# EAGLE board NS_ARM_Control_07_15_2017 (EAGLE 6.6.0)
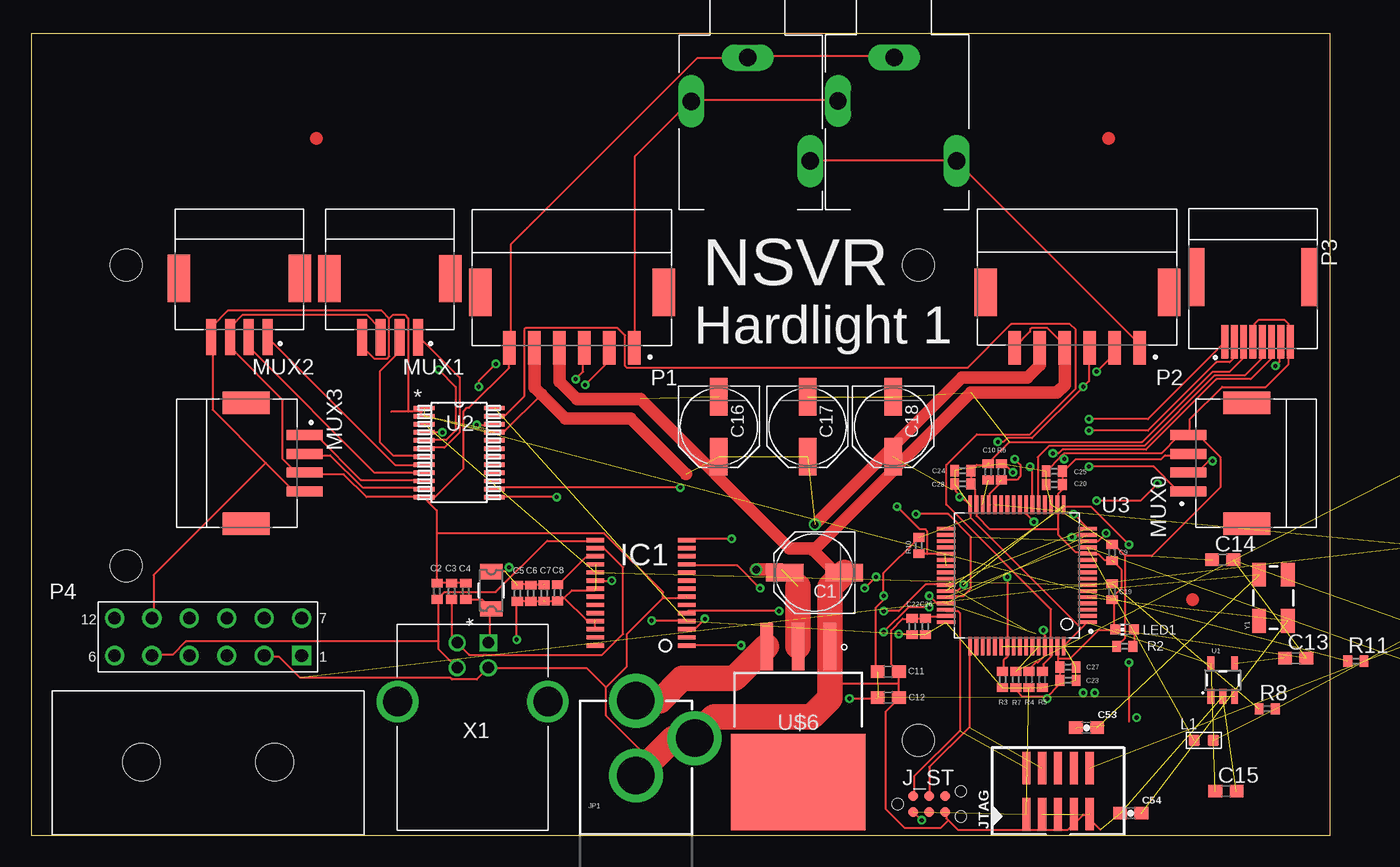
[diagram p0: board, top side]
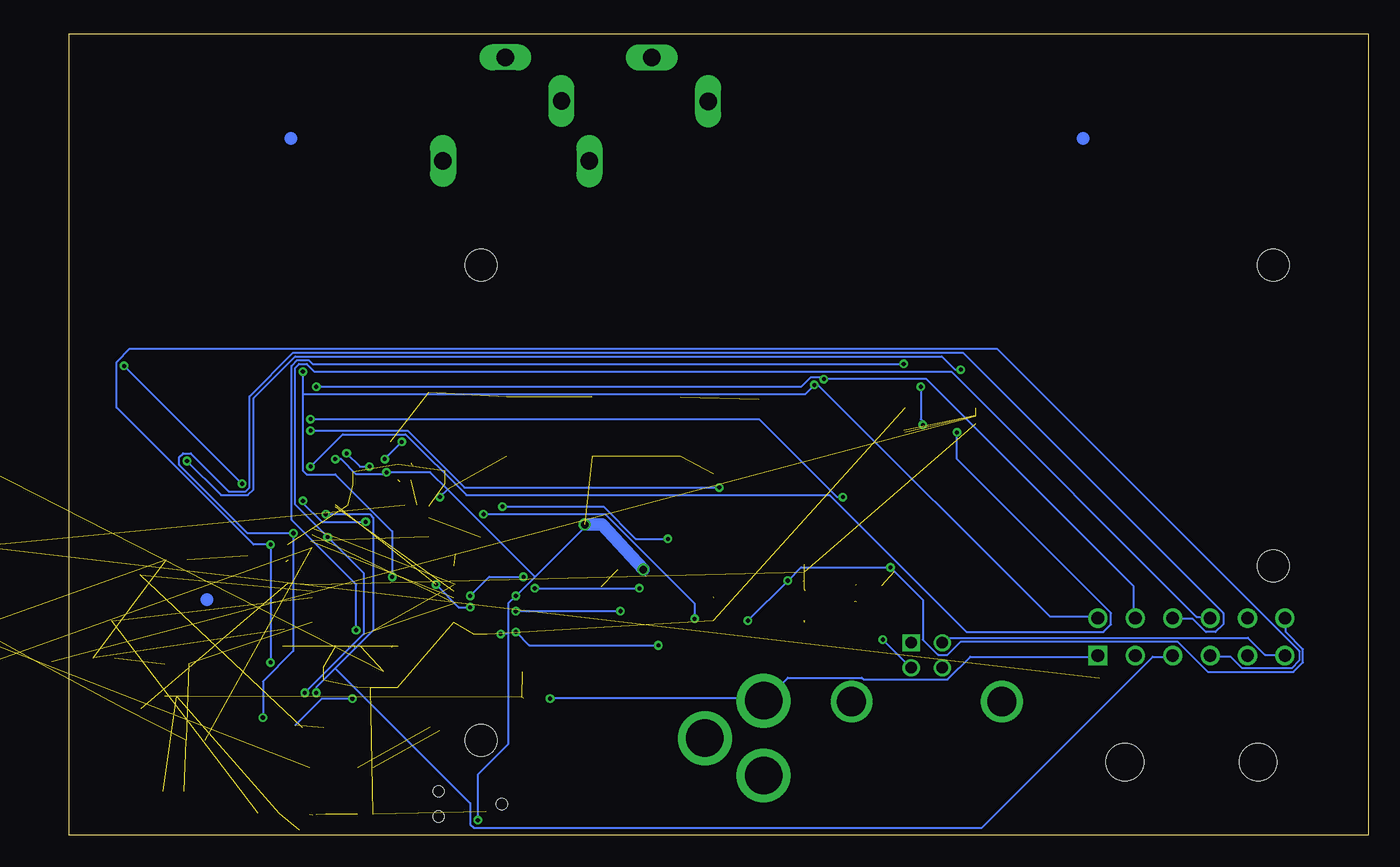
[diagram p1: board, bottom side, seen from below]

Size 104.14 x 64.26 mm. Coordinates in mm from the lower left corner, seen from the top.
Outline: 104.14,0 104.14,64.26 0,64.26 0,0 104.14,0
Copper layers (1*16): Top 0.0356mm / dielectric 1.5011mm / Bottom 0.0356mm
Design rules "LaenPCBOrder (OSH Park)": minimum track width 6mil, minimum drill 13mil, track to track 6mil, track to pad 6mil, pad to pad 6mil, via to via 6mil, smd to smd 6mil, copper to edge 15mil, drill to drill 6mil, minimum pad ring 7mil, minimum via ring 7mil, stop-mask expansion 3mil, vias tented up to drill 0mil, thermal gap 10mil
Net classes: 1 vcc: width 0.254 mm
Holes 2.54 mm at 71.12,45.72 7.62,45.72 71.12,7.62 7.62,21.59

## Footprints (pad centres in the part's own frame; a part is rotated, then mirrored left to right if it is on the bottom)
PANASONIC_D = smd 3 x 1.4: + 2.4,0; - -2.4,0
C0402 = smd 0.7 x 0.9: 1 -0.65,0; 2 0.65,0
C0603 = smd 1.1 x 1: 1 -0.85,0; 2 0.85,0
0603-CAP = smd 1.1 x 1: 1 -0.85,0; 2 0.85,0
1206LSERIES = smd 1.219 x 1.778: 1 -1.499,0; 2 1.499,0
SSOP28DB = smd 0.348 x 1.397: 1 -4.225,-3.656; 2 -3.575,-3.656; 3 -2.925,-3.656; 4 -2.275,-3.656; 5 -1.625,-3.656; 6 -0.975,-3.656; 7 -0.325,-3.656; 8 0.325,-3.656; 9 0.975,-3.656; 10 1.625,-3.656; 11 2.275,-3.656; 12 2.925,-3.656; 13 3.575,-3.656; 14 4.225,-3.656; 15 4.225,3.656; 16 3.575,3.656; 17 2.925,3.656; 18 2.275,3.656; 19 1.625,3.656; 20 0.975,3.656; 21 0.325,3.656; 22 -0.325,3.656; 23 -0.975,3.656; 24 -1.625,3.656; 25 -2.275,3.656; 26 -2.925,3.656; 27 -3.575,3.656; 28 -4.225,3.656
TC2030-MCP-NL = smd 0.787 x 0.787: 1 1.27,-0.635; 2 1.27,0.635; 3 2.54,-0.635; 4 2.54,0.635; 5 3.81,-0.635; 6 3.81,0.635 | hole 0.889: 0,0; 5.08,-1.016; 5.08,1.016
POWER_JACK_PTH = drill 2.997 pad 4.318: GND 0,7.7; GNDBREAK 4.7,10.7; PWR 0,13.7
2X05_1.27MM_SMT = smd 0.65 x 2.6: 1 -2.54,-1.85; 2 -2.54,1.85; 3 -1.27,-1.85; 4 -1.27,1.85; 5 0,-1.85; 6 0,1.85; 7 1.27,-1.85; 8 1.27,1.85; 9 2.54,-1.85; 10 2.54,1.85
L0603 = smd 0.889 x 0.889: 1 -0.762,0; 2 0.762,0
CHIP-LED0603 = smd 0.8 x 0.8: A 0,-0.75; C 0,0.75
MOLEX_502585-0470 = smd 0.8 x 2.9: 1 -2.25,0; 2 -0.75,0; 3 0.75,0; 4 2.25,0 | smd 1.8 x 3.8: P1 -4.85,-4.7; P2 4.85,-4.7
MOLEX_502494-0670 = smd 1 x 2.7: 1 -5,0; 2 -3,0; 3 -1,0; 4 1,0; 5 3,0; 6 5,0 | smd 1.8 x 3.8: P1 -7.35,-4.45; P2 7.35,-4.45
MOLEX_503148-0890 = smd 0.55 x 2.7: 1 2.25,0; 2 1.5,0; 3 0.75,0; 4 0,0; 5 -0.75,0; 6 -1.5,0; 7 -2.25,0; 8 -3,0 | smd 1.2 x 4.65: P1 -4.48,-5.175; P2 4.48,-5.175
MOLEX_44428-1201 = drill 1.02 square: 1 7.5,5.065 | drill 1.02: 2 4.5,5.065; 3 1.5,5.065; 4 -1.5,5.065; 5 -4.5,5.065; 6 -7.5,5.065; 7 7.5,8.065; 8 4.5,8.065; 9 1.5,8.065; 10 -1.5,8.065; 11 -4.5,8.065; 12 -7.5,8.065 | hole 3: -5.34,-3.465; 5.34,-3.465
R0402 = smd 0.7 x 0.9: 1 -0.65,0; 2 0.65,0
0603-RES = smd 1.1 x 1: 1 -0.85,0; 2 0.85,0
SOT23-5 = smd 0.55 x 1.2: 1 -0.95,-1.3; 2 0,-1.3; 3 0.95,-1.3; 4 0.95,1.3; 5 -0.95,1.3
PW24 = smd 1.676 x 0.356: 1 -2.819,3.575; 2 -2.819,2.925; 3 -2.819,2.275; 4 -2.819,1.625; 5 -2.819,0.975; 6 -2.819,0.325; 7 -2.819,-0.325; 8 -2.819,-0.975; 9 -2.819,-1.625; 10 -2.819,-2.275; 11 -2.819,-2.925; 12 -2.819,-3.575; 13 2.819,-3.575; 14 2.819,-2.925; 15 2.819,-2.275; 16 2.819,-1.625; 17 2.819,-0.975; 18 2.819,-0.325; 19 2.819,0.325; 20 2.819,0.975; 21 2.819,1.625; 22 2.819,2.275; 23 2.819,2.925; 24 2.819,3.575
QFP50P1200X1200X160-64N = smd 1.5 x 0.3: 1 -5.67,3.75; 2 -5.67,3.25; 3 -5.67,2.75; 4 -5.67,2.25; 5 -5.67,1.75; 6 -5.67,1.25; 7 -5.67,0.75; 8 -5.67,0.25; 9 -5.67,-0.25; 10 -5.67,-0.75; 11 -5.67,-1.25; 12 -5.67,-1.75; 13 -5.67,-2.25; 14 -5.67,-2.75; 15 -5.67,-3.25; 16 -5.67,-3.75; 33 5.67,-3.75; 34 5.67,-3.25; 35 5.67,-2.75; 36 5.67,-2.25; 37 5.67,-1.75; 38 5.67,-1.25; 39 5.67,-0.75; 40 5.67,-0.25; 41 5.67,0.25; 42 5.67,0.75; 43 5.67,1.25; 44 5.67,1.75; 45 5.67,2.25; 46 5.67,2.75; 47 5.67,3.25; 48 5.67,3.75 | smd 0.3 x 1.5: 17 -3.75,-5.67; 18 -3.25,-5.67; 19 -2.75,-5.67; 20 -2.25,-5.67; 21 -1.75,-5.67; 22 -1.25,-5.67; 23 -0.75,-5.67; 24 -0.25,-5.67; 25 0.25,-5.67; 26 0.75,-5.67; 27 1.25,-5.67; 28 1.75,-5.67; 29 2.25,-5.67; 30 2.75,-5.67; 31 3.25,-5.67; 32 3.75,-5.67; 49 3.75,5.67; 50 3.25,5.67; 51 2.75,5.67; 52 2.25,5.67; 53 1.75,5.67; 54 1.25,5.67; 55 0.75,5.67; 56 0.25,5.67; 57 -0.25,5.67; 58 -0.75,5.67; 59 -1.25,5.67; 60 -1.75,5.67; 61 -2.25,5.67; 62 -2.75,5.67; 63 -3.25,5.67; 64 -3.75,5.67
SJ1-351XN = drill 1.4 long: 1 0.8,0; 2 4.3,-4.5; 3 9.1,5
TO254P1524X483-4N = smd 3.8 x 1: 1 -6.4,2.54; 2 -6.4,0; 3 -6.4,-2.54 | smd 7.75 x 10.75: TAB 4.45,0
OST_USB-B1HSB6 = drill 0.92 square: 1 1.25,4.71 | drill 0.92: 2 -1.25,4.71; 3 -1.25,2.71; 4 1.25,2.71 | drill 2.33: P1 -6.02,0; P2 6.02,0
CRYSTAL-SMD-5X3 = smd 1.9 x 1.1: 1 -1.85,-1.15; 2 1.85,-1.15; 3 1.85,1.15; 4 -1.85,1.15

## Placement (x,y rotation side)
C1  47u  [PANASONIC_D]  62.78,21.07 180 top
C2  47pF  [C0402]  32.53,19.58 90 top
C3  47pF  [C0402]  33.7,19.58 90 top
C4  100nF  [C0402]  34.84,19.57 90 top
C5  100nF  [C0402]  38.97,19.41 270 top
C6  4.7uF  [C0402]  40.04,19.42 270 top
C7  100nF  [C0402]  41.12,19.44 270 top
C8  0.1uF  [C0402]  42.19,19.45 270 top
C9  10nF  [C0402]  86.63,22.68 270 top
C10  2.2uF  [C0402]  76.71,29.14 90 top
C11  10uF  [C0603]  68.69,13.13 0 top
C12  10uF  [C0603]  68.7,11.06 0 top
C13  470pF  [C0603]  101.35,14.22 0 top
C14  10uF  [C0603]  95.5,22.1 0 top
C15  10uF  [C0603]  95.76,3.56 0 top
C16  47u  [PANASONIC_D]  55.12,32.77 270 top
C17  47u  [PANASONIC_D]  62.23,32.77 270 top
C18  47u  [PANASONIC_D]  69.09,32.77 270 top
C19  100nF  [C0402]  86.63,19.54 270 top
C20  100nF  [C0402]  82,28.14 0 top
C22  100nF  [C0402]  70.61,16.76 90 top
C23  100nF  [C0402]  83.1,12.44 180 top
C24  100nF  [C0402]  74.67,29.24 0 top
C25  4.7uF  [C0402]  82,29.19 0 top
C26  4.7uF  [C0402]  71.67,16.76 90 top
C27  4.7uF  [C0402]  83.1,13.5 180 top
C28  4.7uF  [C0402]  74.67,28.18 0 top
C29  1uF  [C0402]  112.27,13.46 0 top  (outside the outline)
C53  33pF  [0603-CAP]  84.58,8.64 0 top
C54  33pF  [0603-CAP]  88.14,1.78 0 top
C60  0.1uF  [0603-CAP]  111.51,17.02 0 top  (outside the outline)
F1  1206L050YR  [1206LSERIES]  36.88,19.65 90 top
IC1  FT232RL  [SSOP28DB]  48.87,19.46 90 top
J_ST  [TC2030-MCP-NL]  69.44,2.52 0 top
JP1  POWER_JACKPTH  [POWER_JACK_PTH]  48.47,-2.9 0 top
JTAG  [2X05_1.27MM_SMT]  82.3,3.56 0 top
L1  120OHM-500MA  [L0603]  93.98,7.62 0 top
LED1  [CHIP-LED0603]  87.64,16.5 90 top
MUX0  502585-0470  [MOLEX_502585-0470]  92.73,29.84 90 top
MUX1  502585-0470  [MOLEX_502585-0470]  28.76,39.94 180 top
MUX2  502585-0470  [MOLEX_502585-0470]  16.7,39.95 180 top
MUX3  502585-0470  [MOLEX_502585-0470]  21.93,29.84 270 top
P1  502494-0670  [MOLEX_502494-0670]  43.34,39.09 180 top
P2  502494-0670  [MOLEX_502494-0670]  83.84,39.1 180 top
P3  503148-0890  [MOLEX_503148-0890]  97.92,39.58 180 top
P4  44428-1201  [MOLEX_44428-1201]  14.18,9.35 0 top
R1  DNP  [R0402]  111.51,23.11 0 top  (outside the outline)
R2  470  [R0402]  87.65,15.17 0 top
R3  4.7k  [R0402]  77.85,12.5 90 top
R4  4.7k  [R0402]  79.98,12.5 90 top
R5  4.7k  [R0402]  81.04,12.51 90 top
R6  4.7k  [R0402]  77.76,29.15 270 top
R7  10k  [R0402]  78.92,12.5 90 top
R8  10k  [R0402]  99.06,10.16 0 top
R10  10k  [R0402]  71.14,23.23 90 top
R11  10k  [R0402]  106.17,13.97 0 top
R12  DNP  [R0402]  113.54,30.48 0 top  (outside the outline)
R14  10k  [0603-RES]  118.11,18.03 0 top  (outside the outline)
U1  3.3V/150mA  [SOT23-5]  95.5,12.45 0 top
U2  PCA9548A_PW_24  [PW24]  34.3,30.69 0 top
U3  STM32F401RET6  [QFP50P1200X1200X160-64N]  79,20.84 180 top
U$1  [CIRCLE-1MM-3R]  22.86,55.88 0 top
U$2  [CIRCLE-1MM-3R]  86.36,55.88 0 top
U$3  SJ1-3513N  [SJ1-351XN]  69.16,63.18 270 top
U$4  SJ1-3513N  [SJ1-351XN]  57.42,63.16 270 top
U$5  [CIRCLE-1MM-3R]  93.09,18.89 0 top
U$6  LMS1585AIS-3.3/NOPB-ND  [TO254P1524X483-4N]  61.48,8.74 270 top
X1  USB-B1HSB6  [OST_USB-B1HSB6]  35.39,10.73 0 top
Y1  8MHz  [CRYSTAL-SMD-5X3]  99.57,19.05 90 top

## Library data of the parts
C1 C16-C18 = SparkFun-Capacitors
C2-C15 C19 C20 C22-C29 R1-R8 R10-R12 = rcl
C53 C54 C60 = BeeSafe
F1 = 1206L050; COPYRIGHT: Copyright C 2015 Accelerated Designs. All rights reserved; MANUFACTURER_PART_NUMBER: 1206L050YR; VENDOR: Littelfuse Inc
IC1 = ftdichip-3
J_ST = tag-connect
JP1 = SparkFun-Connectors; PROD_ID: CONN-08197
JTAG = PatternAgents-Cypress
L1 = Seeed-Inductor-2016; MPN: BLM18AG121SN1D
LED1 = led
MUX0 MUX1-MUX3 = 502585-0470; AVAILABILITY: Good; DESCRIPTION: 1.50mm Pitch CLIK-Mate™ Wire-to-Board PCB Receptacle, Single Row, Right Angle, 4 Circuits; MF: Molex; MP: 502585-0470; PACKAGE: None; PRICE: 0.44 USD
P1 P2 = 502494-0670; AVAILABILITY: Good; DESCRIPTION: 2.00mm Pitch CLIK-Mate™ Wire-to-Board PCB Receptacle, Single Row, Right Angle, 6 Circuits; MF: Molex; MP: 502494-0670; PACKAGE: None; PRICE: 0.53 USD
P3 = 503148-0890; AVAILABILITY: Good; DESCRIPTION: 1.5wb Dual r/a Embs Tape Pkg 8p; MF: Molex; MP: 503148-0890; PACKAGE: None; PRICE: 1.11 USD
P4 = 44428-1201; AVAILABILITY: Good; DESCRIPTION: Conn Wire to Board HDR 12 POS 3mm Solder RA Thru-Hole Micro-Fit 3.0 BMI? Tray; MF: Molex; MP: 44428-1201; PACKAGE: None; PRICE: 2.39 USD
R14 = PatternAgents-Misc
U1 = SparkFun-PowerIC; PROD_ID: VREG-00822
U2 = PCA9548A_PW_124; DATASHEETURL: http://www.ti.com/lit/gpn/PCA9548A; DESCRIPTION: 8-Channel I2C Switch With Reset; FAMILY_NAME: I2C MULTIPLEXER, SWITCH; GENERIC_PART_NUMBER: PCA9548A; INDUSTRY_STD_PKG_TYPE: TSSOP; MANUFACTURER: Texas Instruments; MANUFACTURER_PART_NUMBER: pca9548a_pw_24; PACKAGE_DESIGNATOR: PW; PIN_COUNT: 24; VENDOR: Texas Instruments
U3 = STM32F401RET6; AVAILABILITY: Good; DESCRIPTION: MCU 32-Bit STM32 ARM Cortex M4 RISC 512KB Flash 1.8V/2.5V/3.3V 64-Pin LQFP Tray; MF: STMicroelectronics; MP: STM32F401RET6; PACKAGE: LQFP-64 STMicroelectronics; PRICE: 4.74 USD
U$1 U$2 U$5 = fiducial
U$3 U$4 = audio_mux
U$6 = TO254P1524X483-4N
X1 = USB-B1HSB6; AVAILABILITY: Warning; DESCRIPTION: Conn Usb Type b r/a Black; MF: On Shore Technology; MP: USB-B1HSB6; PACKAGE: None; PRICE: 0.42 USD
Y1 = SparkFun2

## Nets
3.3FV: C8.1 IC1.17
3V3_EXT: C1.+ C14.1 C16.+ C17.+ C18.+ MUX0.4 MUX1.4 MUX2.4 MUX3.4 P1.5 P2.5 P3.4 P3.8 P4.11 U$6.2
5V0: C5.1 C6.1 C7.1 F1.2 IC1.20 P4.12
!PWREN_FTDI: IC1.14 R10.1 U3.39
!RST: C19.1 IC1.19 R8.1 U2.3 U3.7
!RXLED_FTDI: IC1.22
!SLEEP_FTDI: IC1.12
!SWRST_ST: JTAG.10 R14.1
!TXDEN_FTDI: IC1.13
!TXLED_FTDI: IC1.23
AUD_L: P1.1 U$3.2 U$4.2
AUD_R: P2.1 U$3.3 U$4.3
BOOT0: R7.2 R12.1 U3.60
BOOT1: R1.2 U3.28
CTS_BMD: P4.10 U3.45
CTS_FTDI: IC1.11 U3.15
DCD_FTDI: IC1.10
DSR_FTDI: IC1.9
DTR_FTDI: IC1.2
GND: C1.- C2.2 C3.2 C4.2 C5.2 C6.2 C7.2 C8.2 C9.2 C10.2 C11.2 C12.2 C13.2 C14.2 C15.2 C16.- C17.- C18.- C19.2 C20.2 C22.2 C23.2 C24.2 C25.2 C26.2 C27.2 C28.2 C29.2 C53.1 C54.1 C60.1 IC1.7 IC1.18 IC1.21 IC1.25 IC1.26 J_ST.5 JP1.GND JP1.GNDBREAK JTAG.3 JTAG.5 JTAG.7 JTAG.9 LED1.C MUX0.3 MUX1.3 MUX2.3 MUX3.3 P1.4 P1.6 P2.4 P2.6 P3.3 P4.2 R1.1 R7.1 U1.2 U2.12 U3.12 U3.18 U3.31 U3.47 U3.63 U$3.1 U$4.1 U$6.1 X1.4
I2C0_SDA: U2.23
I2C1_SCL: R4.2 U2.22 U3.61
I2C1_SDA: R5.2 U3.62
I2C2_SCL: P1.3 P2.3 P4.8 R6.2 U3.29
I2C2_SDA: P1.2 P2.2 P4.7 R3.2 U3.55
LED1: LED1.A R2.2
N$2: C4.1 F1.1 X1.1
N$7: C13.1 U1.4
N$9: U3.41
N$10: U3.50
OSC_IN: C54.2 U3.5 Y1.1
OSC_OUT: C53.2 U3.6 Y1.3
OSCI_FTDI: IC1.27
OSCO_FTDI: IC1.28
PA4: U3.20
PB0: U3.26
PB1: U3.27
PB4: U3.56
PB5: U3.57
PB6: U3.58
PB7: U3.59
PB12: U3.33
PB13: U3.34
PB14: U3.35
PB15: U3.36
PC0: U3.8
PC1: U3.9
PC2: U3.10
PC3: U3.11
PC4: U3.24
PC5: U3.25
PC9: U3.40
PC10: U3.51
PC11: U3.52
PC12: U3.53
PC13: U3.2
PC14: U3.3
PC15: U3.4
PUP: R11.1 U2.1 U2.2 U2.21
PWM_B: P3.7 U3.23
PWM_G: P3.6 U3.22
PWM_R: P3.5 U3.21
RI_FTDI: IC1.6
RTS_BMD: P4.9 U3.44
RTS_FTDI: IC1.3 U3.14
RXD_BMD: P4.3 U3.42
RXD_FTDI: IC1.5 U3.16
SC0: MUX0.2 U2.5
SC1: MUX1.2 U2.7
SC2: MUX2.2 U2.9
SC3: MUX3.2 U2.11
SC4: P3.2 U2.14
SC5: U2.16
SC6: U2.18
SC7: U2.20
SD0: MUX0.1 U2.4
SD1: MUX1.1 U2.6
SD2: MUX2.1 U2.8
SD3: MUX3.1 U2.10
SD4: P3.1 U2.13
SD5: U2.15
SD6: U2.17
SD7: U2.19
STATUS_LED: R2.1 U3.54
SWCLK_ST: J_ST.4 JTAG.4 U3.49
SWDIO_ST: J_ST.2 JTAG.2 U3.46
SWO_ST: JTAG.6
SWV_ST: JTAG.8
TXD_BMD: P4.4 U3.43
TXD_FTDI: IC1.1 U3.17
UART6_RX: U3.38
UART6_TX: U3.37
USB_D+: C2.1 IC1.15 P4.5 X1.3
USB_D-: C3.1 IC1.16 P4.6 X1.2
VCAP: C10.1 U3.30
VDD: C9.1 C15.1 C20.1 C22.1 C23.1 C24.1 C25.1 C26.1 C27.1 C28.1 C60.2 IC1.4 J_ST.1 JTAG.1 L1.2 R3.1 R4.1 R5.1 R6.1 R8.2 R10.2 R11.2 R12.2 R14.2 U1.5 U2.24 U3.1 U3.19 U3.32 U3.48 U3.64
VDDA: C29.1 L1.1 U3.13
VIN_DC: C11.1 C12.1 JP1.PWR P4.1 U1.1 U1.3 U$6.3
VSS(GND): J_ST.3

## Tracks (layer width: path | path; a pad name or v marks a point on that pad's centre or on a via)
3.3FV
  Top 0.152: C8.1 42.27,20.12 44.4,22.25 45.16,22.25 IC1.17
3V3_EXT  (via drill 0.33, 0.6)  (8 unrouted)
  Top 0.152: 52.17,28.65 52.49,28.97 | 87.68,22.4 86.77,23.32 | 87.68,22.4 87.68,15.85 87.07,15.24 | P3.4 98.04,39.62 98.04,41 98.35,41.3 100.48,41.3 100.79,41 100.79,39.62 P3.8 100.79,39.47 100.79,37.8 98.96,35.97 95.45,35.97 92.86,33.38 92.86,32.16 MUX0.4 | 82.5,30.33 82.8,30.63 90.58,30.63 91.95,32 92.71,32 MUX0.4 | 82.5,30.33 81.43,29.26 | 87.68,22.4 89.81,22.4 95.3,27.89 95.3,30.33 93.62,32 92.86,32 MUX0.4 | 31.14,33.98 31.29,33.98 31.45,34.14 | 31.14,33.98 30.23,33.98 | 30.23,33.98 28.85,33.98 | 31.14,33.98 31.45,33.68 | 30.23,33.98 30.23,41.45 29.92,41.76 29.01,41.76 28.7,41.45 | 28.7,41.45 28.7,38.41 28.55,38.25 27.48,38.25 26.57,39.17 26.57,39.93 MUX1.4 | 28.7,41.45 28.09,42.06 15.75,42.06 14.53,40.84 14.53,40.08 MUX2.4 14.53,39.93 14.53,34.14 18.8,29.87 | 18.8,29.87 20.93,27.74 21.84,27.74 MUX3.4 | 18.8,29.87 9.8,20.88 9.8,17.53 P4.11 | 74.12,28.04 74.12,27.58 74.57,27.13 | 75.18,26.52 74.57,27.13 | 71.07,23.77 68.33,21.03 v68.33,19.2 68.33,18.9 67.72,18.29 67.72,13.26 | v71.37,1.22 70.76,1.83 | 77.78,29.72 78.08,29.72 v78.69,29.11 | 37.24,32.46 38,32.46 40.89,35.36 | v69.55,16.15 70.61,16.15 | v74.42,27.13 74.57,27.13 | 82.5,30.33 82.65,30.33 v82.8,30.18
  Top 1.016: P1.5 40.34,35.91 40.89,35.36 42.82,33.43 48.02,33.43 52.49,28.97 | P2.5 80.83,37.69 79.86,36.72 74.61,36.72 v62.81,24.92 | v58.11,21.31 60.14,21.31
  Top 2.032: U$6.2 61.48,19.98
  Bottom 0.152: 57.96,20.88 v58.11,21.31 57.66,21.18 | v71.37,1.22 71.37,4.88 68.94,7.32 68.94,16.15 | 68.94,16.15 68.94,18.59 v68.33,19.2 66.8,20.73 | 66.8,20.73 62.99,24.54 v62.81,24.92 | 66.8,20.73 73.81,27.74 | 73.81,27.74 75.18,29.11 v78.69,29.11 78.84,28.96 81.13,28.96 82.35,30.18 v82.8,30.18 | 68.94,16.15 v69.55,16.15 | 73.81,27.74 v74.42,27.13
  Bottom 1.016: v62.81,24.92 61.41,24.92 v58.11,21.31
5V0  (via drill 0.33)  (3 unrouted)
  Top 0.152: C5.1 39.06,20.12 39.98,20.12 C6.1 40.13,20.12 41.05,20.12 | v49.73,17.22 52.48,17.22 | 45.31,20.42 v46.53,20.42 | v38.3,21.49 38,21.18 36.93,21.18 F1.2
  Bottom 0.152: v49.73,17.22 v46.53,20.42 45.47,21.49 v38.3,21.49 35.71,18.9 35.71,15.7 34.49,14.48 33.73,14.48 32.66,15.54 15.29,15.54 12.85,13.11 5.99,13.11 5.23,13.87 5.23,14.94 6.6,16.31 6.6,17.37 P4.12
!PWREN_FTDI  (via drill 0.33)  (1 unrouted)
  Top 0.152: 73.2,22.55 71.83,22.55 | 71.83,22.55 71.22,22.55 R10.1 | v56.13,23.77 52.63,23.77 IC1.14 | v69.39,26.36 71.22,24.54 71.68,24.54 71.83,24.38 71.83,22.55
  Bottom 0.152: v56.13,23.77 58.73,23.77 61.32,26.36 v69.39,26.36
!RST  (4 unrouted)
!SWRST_ST  (1 unrouted)
AUD_L
  Top 0.152: P1.1 48.36,39.17 48.36,54.41 52.78,58.83 U$4.2 52.93,58.98 64.52,58.98 U$3.2
AUD_R
  Top 0.152: P2.1 88.75,39.17 88.75,39.47 74.27,53.95 U$3.3 74.12,54.1 62.53,54.1 U$4.3
BOOT0  (2 unrouted)
BOOT1  (1 unrouted)
CTS_BMD  (via drill 0.33)  (1 unrouted)
  Top 0.152: v83.41,23.93 83.72,23.93 83.87,24.08 84.63,24.08
  Bottom 0.152: v85.24,11.43 80.52,16.15 80.52,21.03 v83.41,23.93 86,26.52 86,37.49 85.7,37.8 85.09,37.8 84.48,37.19 33.43,37.19 13.77,17.53 12.7,17.53 P4.10
CTS_FTDI  (via drill 0.33)  (1 unrouted)
  Top 0.152: v58.42,19.81 56.59,21.64 52.63,21.64 IC1.11 | v67.72,20.73 v66.8,19.81 | v71.98,19.2 72.59,18.59 73.2,18.59
  Bottom 0.152: v66.8,19.81 v58.42,19.81 | v67.72,20.73 70.46,20.73 v71.98,19.2
GND  (via drill 0.33)  (28 unrouted)
  Top 0.152: U$3.1 69.09,62.48 57.51,62.48 U$4.1 57.35,62.33 53.39,62.33 38.46,47.4 38.46,39.17 P1.6 38.3,39.01 38.3,37.49 35.1,34.29 34.95,34.29 34.65,33.98 34.65,29.41 31.9,26.67 | C4.2 34.8,20.27 33.73,20.27 C3.2 33.58,20.27 32.66,20.27 C2.2 32.51,20.27 32.51,24.23 | 32.51,24.23 32.51,26.06 31.9,26.67 | 31.9,26.67 31.6,26.98 U2.12 31.45,27.13 26.87,27.13 25.04,28.96 22,28.96 MUX3.3 21.84,29.11 21.23,29.11 20.17,30.18 20.17,34.9 16.05,39.01 16.05,39.93 MUX2.3 16.05,40.08 16.05,40.84 16.97,41.76 26.87,41.76 27.94,40.69 27.94,40.08 MUX1.3 | 81.43,11.12 79.45,11.12 78.99,11.58 78.99,11.73 R7.1 | 81.43,11.12 82.35,12.04 82.35,12.34 C23.2 82.5,12.5 82.5,13.41 C27.2 82.35,13.56 82.35,14.17 | 82.35,14.17 82.35,15.09 U3.63 | 76.56,29.72 75.79,29.72 75.34,29.26 C24.2 75.34,29.11 75.34,28.19 C28.2 75.34,28.04 75.64,27.74 75.64,26.52 U3.31 75.79,26.36 75.79,25.6 76.86,24.54 82.35,24.54 | 86.61,22.1 86,22.1 85.55,22.55 84.78,22.55 U3.12 84.63,22.71 83.72,22.71 82.35,24.08 82.35,24.54 | 86.77,21.95 87.38,21.34 87.38,19.81 86.77,19.2 86.77,18.9 C19.2 86.77,18.75 86.77,16.61 LED1.C 86.77,16.46 85.55,16.46 83.26,14.17 82.35,14.17 | 82.35,24.54 82.35,26.36 U3.18 82.35,26.52 82.35,27.43 82.65,27.74 82.65,28.04 C20.2 82.65,28.19 82.65,29.11 C25.2 82.8,29.26 83.72,30.18 90.58,30.18 90.88,30.48 92.71,30.48 MUX0.3 | 76.71,29.87 78.38,31.55 89.05,31.55 94.69,37.19 96.06,37.19 97.13,38.25 97.13,39.47 P3.3 | 45.16,17.07 45.16,16.61 IC1.26 | 41.2,18.75 42.11,18.75 C8.2 42.27,18.9 42.57,18.9 42.72,19.05 | 41.05,18.75 40.13,18.75 C6.2 39.98,18.75 39.06,18.75 C5.2 38.91,18.75 v38.91,15.7
  Top 0.152: 45.16,19.66 43.33,19.66 42.72,19.05 | 45.16,17.22 44.55,17.22 42.72,19.05 | 84.48,1.68 84.33,1.68 83.11,0.46 74.27,0.46 73.51,1.22 | 84.48,1.68 84.63,1.68 | 73.51,1.22 73.36,1.37 73.36,1.83 J_ST.5 | U3.47 73.2,17.53 71.68,17.53 C26.2 71.53,17.37 70.76,17.37 C22.2 70.61,17.37 69.85,17.37 68.94,16.46 68.94,13.72 69.39,13.26 C11.2 69.55,13.11 69.55,12.19 | 69.55,12.19 69.55,11.12 C12.2 69.55,10.97 68.48,9.91 68.48,2.13 70,0.61 72.9,0.61 73.51,1.22 | 50.65,19.05 52.48,19.05 | 50.65,19.05 47.75,16.15 47.75,13.56 46.08,11.89 | 46.08,11.89 46.08,9.6 48.97,6.71 JP1.GND | 64.02,12.19 69.55,12.19 | P2.6 78.84,39.17 80.06,40.39 80.06,40.54 80.21,40.69 81.43,40.69 82.65,39.47 P2.4 | 46.08,11.89 44.55,13.41 36.78,13.41 X1.4 36.63,13.41 35.71,12.5 33.73,12.5 33.58,12.65 21.54,12.65 19.86,14.33 18.8,14.33 P4.2 | 84.48,1.68 85.7,0.46 | v81.43,10.97 81.43,11.12 | 32.51,24.23 45.92,24.23 50.65,19.51 50.65,19.05
  Top 1.016: P1.4 42.34,36.38 43.75,34.97 48.83,34.97 60.77,23.02 62.52,23.02 62.68,22.86 | 62.68,22.86 64.83,20.72 | P2.4 82.83,36.12 82.22,35.5 75.32,35.5 62.68,22.86
  Top 2.032: JP1.GND 51.47,7.8 JP1.GNDBREAK 53.17,7.95 54.73,9.52 62.55,9.52 64.02,10.98 64.02,12.19 U$6.1 64.02,19.91 64.83,20.72 C1.-
  Bottom 0.152: v38.91,15.7 36.78,13.56 X1.4 | v81.43,10.97 83.87,10.97 86,8.84
I2C0_SDA
  Top 0.152: 81.74,15.24 81.74,18.14 73.36,26.52 73.36,29.72 75.79,32.16 80.06,32.16 83.72,35.81 83.72,40.54 83.26,41 78.54,41 75.03,37.49 47.75,37.49 47.6,37.64 47.6,40.08 46.99,40.69 39.67,40.69 39.52,40.54 39.52,35.2 38,33.68 37.24,33.68 U2.23
I2C1_SCL  (via drill 0.33)  (2 unrouted)
  Top 0.152: 81.28,15.09 81.28,14.48 80.67,13.87 80.52,13.87 80.06,13.41 80.06,13.26 R4.2 | v35.71,32.92 37.08,32.92 U2.22 | v35.87,35.97 35.87,36.42 v37.24,37.8 | v81.13,16.46 81.13,16.15 81.28,16 81.28,15.24
  Bottom 0.152: v35.71,32.92 35.71,33.22 35.87,33.38 v35.87,35.97 | v37.24,37.8 84.63,37.8 84.94,38.1 85.85,38.1 86.31,37.64 86.31,25.3 81.13,20.12 v81.13,16.46
I2C1_SDA  (1 unrouted)
  Top 0.152: 81.74,15.09 81.74,14.33 81.13,13.72 81.13,13.26 R5.2
I2C2_SCL  (via drill 0.33)  (2 unrouted)
  Top 0.152: 77.62,28.35 77.62,28.19 76.86,27.43 76.86,26.52 U3.29 | 77.78,28.5 78.99,28.5 79.3,28.8 79.3,29.72 v78.84,30.18 | v77.47,31.55 77.93,31.55 78.23,31.85 80.21,31.85 v84.33,35.97 84.78,36.42 84.78,39.01 P2.3 | v43.64,36.58 44.25,37.19 44.25,39.01 P1.3
  Bottom 0.152: v77.47,31.55 v78.84,30.18 | P4.8 18.8,17.53 18.8,19.96 35.41,36.58 v43.64,36.58 43.79,36.73 44.7,36.73 45.47,35.97 v84.33,35.97
I2C2_SDA  (via drill 0.33)  (2 unrouted)
  Top 0.152: 78.23,15.09 78.23,14.33 77.93,14.02 77.93,13.26 R3.2 | v78.23,20.73 78.23,15.24 | v85.39,37.19 86.77,38.56 86.77,39.01 P2.2 | v44.4,36.12 46.23,37.95 46.23,39.01 P1.2
  Bottom 0.152: v78.23,20.73 78.23,24.38 82.8,28.96 85.09,28.96 85.39,29.26 85.39,35.36 | v85.39,37.19 85.39,35.36 | P4.7 21.69,17.53 25.5,17.53 44.09,36.12 v44.4,36.12 45.16,35.36 85.39,35.36
LED1
  Top 0.152: LED1.A 88.44,16.46 88.44,15.24 R2.2
N$2
  Top 0.152: C4.1 34.95,18.9 36.17,18.9 36.78,18.29 F1.1 36.78,18.14 36.78,15.54 X1.1
N$7  (1 unrouted)
OSC_IN  (2 unrouted)
OSC_OUT  (2 unrouted)
PUP  (3 unrouted)
PWM_B  (via drill 0.33)
  Top 0.152: v80.37,25.15 79.76,25.76 79.76,26.36 U3.23 | v85.39,26.82 88.9,26.82 v90.27,28.19 | v99.72,37.64 100.03,37.95 100.03,39.47 P3.7
  Bottom 0.152: v80.37,25.15 83.87,25.15 85.39,26.67 v85.39,26.82 | v99.72,37.64 v90.27,28.19
PWM_G  (via drill 0.33)
  Top 0.152: v80.06,29.57 80.21,29.41 80.21,26.52 U3.22 | v81.89,30.63 82.35,30.63 82.65,30.94 89.36,30.94 95,36.58 97.74,36.58 99.42,38.25 99.42,39.47 P3.6
  Bottom 0.152: v80.06,29.57 80.82,29.57 v81.89,30.63
PWM_R
  Top 0.152: U3.21 80.67,26.52 80.67,30.33 81.58,31.24 89.2,31.24 94.84,36.88 97.28,36.88 98.65,38.25 98.65,39.47 P3.5
RTS_BMD  (via drill 0.33)  (1 unrouted)
  Top 0.152: v86.16,24.23 85.55,23.62 84.78,23.62
  Bottom 0.152: v88.59,9.45 88.59,12.34 86.16,14.78 v86.16,24.23 89.81,24.23 95.3,29.72 95.3,30.33 95,30.63 94.39,30.63 91.34,27.58 89.97,27.58 89.66,27.89 89.66,35.2 86.16,38.71 32.51,38.71 11.63,17.83 11.63,16.92 12.24,16.31 13.01,16.31 14.07,17.37 15.6,17.37 P4.9
RTS_FTDI  (via drill 0.33)  (1 unrouted)
  Top 0.152: v54,17.37 53.24,16.61 52.63,16.61 IC1.3 | v70.92,25.76 73.51,25.76 75.34,23.93 75.34,19.81 74.73,19.2 73.36,19.2
  Bottom 0.152: v54,17.37 54,18.59 61.16,25.76 v70.92,25.76
RXD_BMD  (via drill 0.33)  (1 unrouted)
  Top 0.152: 84.63,24.69 v83.57,25.76
  Bottom 0.152: v84.33,11.43 84.33,11.89 82.8,13.41 | 82.8,13.41 79.76,16.46 79.76,25.45 80.06,25.76 v83.57,25.76 | 82.8,13.41 71.98,2.59 71.98,0.91 71.68,0.61 30.99,0.61 17.27,14.33 15.75,14.33 P4.3
RXD_FTDI  (via drill 0.33)  (1 unrouted)
  Top 0.152: v59.94,17.98 52.63,17.98 IC1.5 | v68.33,17.98 69.55,17.98 71.68,20.12 73.2,20.12
  Bottom 0.152: v68.33,17.98 v59.94,17.98
SC0  (via drill 0.33)
  Top 0.152: v32.66,37.34 34.04,35.97 34.04,32.46 33.27,31.7 31.6,31.7 U2.5 | v94.69,30.02 94.39,30.02 93.47,29.11 92.86,29.11 MUX0.2
  Bottom 0.152: v32.66,37.34 33.12,37.34 34.19,38.41 86,38.41 89.36,35.05 89.36,27.74 89.81,27.28 91.95,27.28 v94.69,30.02
SC1
  Top 0.152: U2.7 31.45,30.48 29.01,30.48 27.94,31.55 27.94,37.19 29.46,38.71 29.46,39.93 MUX1.2
SC2
  Top 0.152: U2.9 31.45,29.11 27.48,29.11 17.58,39.01 17.58,39.93 MUX2.2
SC3
  Top 0.152: U2.11 31.45,27.89 26.57,27.89 23.98,30.48 22,30.48 MUX3.2
SC4  (via drill 0.33)
  Top 0.152: v52.02,27.89 37.24,27.89 U2.14 | v84.78,32.46 89.51,32.46 95,37.95 96.06,37.95 96.37,38.25 96.37,39.47 P3.2
  Bottom 0.152: v52.02,27.89 72.44,27.89 77.01,32.46 v84.78,32.46
SD0  (via drill 0.33)
  Top 0.152: v32.97,32.31 31.6,32.31 U2.4 | v84.78,29.57 89.97,29.57 91.8,27.74 92.71,27.74 MUX0.1
  Bottom 0.152: v32.97,32.31 32.97,30.18 20.62,17.83 20.62,16.92 21.23,16.31 32.21,16.31 43.18,27.28 72.29,27.28 77.17,32.16 82.19,32.16 v84.78,29.57
SD1
  Top 0.152: U2.6 31.6,31.09 33.12,31.09 34.34,32.31 34.34,36.73 31.14,39.93 MUX1.1
SD2
  Top 0.152: U2.8 31.45,29.72 29.16,29.72 18.95,39.93 MUX2.1
SD3
  Top 0.152: U2.10 31.45,28.5 26.42,28.5 22.91,32 22,32 MUX3.1
SD4  (via drill 0.33)
  Top 0.152: v42.11,27.13 37.24,27.13 U2.13 | v84.78,33.38 89.51,33.38 95.61,39.47 P3.1
  Bottom 0.152: v42.11,27.13 42.57,27.13 48.82,33.38 v84.78,33.38
STATUS_LED  (1 unrouted)
SWCLK_ST  (1 unrouted)
  Top 0.152: J_ST.4 71.98,3.2 71.98,5.49 75.18,8.69 75.18,15.09 U3.49
SWDIO_ST  (1 unrouted)
  Top 0.152: J_ST.2 70.76,3.2 70.76,4.72 74.42,8.38 74.42,17.83 74.27,17.98 73.36,17.98 U3.46
TXD_BMD  (via drill 0.33)  (1 unrouted)
  Top 0.152: v87.99,13.87 87.99,9.14 | v87.99,23.32 84.94,26.36 82.8,26.36
  Bottom 0.152: v87.99,13.87 v87.99,23.32 89.36,23.32 100.33,34.29 100.33,37.95 99.26,39.01 29.77,39.01 5.54,14.78 5.54,14.02 6.15,13.41 10.11,13.41 11.02,14.33 12.55,14.33 P4.4
TXD_FTDI  (via drill 0.33)  (1 unrouted)
  Top 0.152: v56.9,15.24 52.63,15.24 IC1.1 | v68.33,16.31 70.31,18.29 v71.98,18.29 | v74.73,20.12 74.27,19.66 73.36,19.66
  Bottom 0.152: v56.9,15.24 67.26,15.24 v68.33,16.31 | v71.98,18.29 72.9,18.29 v74.73,20.12
USB_D+
  Top 0.152: 32.66,15.54 32.66,14.94 34.04,13.56 X1.3 | 32.66,15.54 32.66,18.9 C2.1 32.66,19.05 33.12,19.51 37.24,19.51 41.35,23.62 45.16,23.62 IC1.15 | 32.66,15.54 12.39,15.54 11.33,14.48 9.8,14.48 P4.5
USB_D-
  Top 0.152: C3.1 33.73,18.9 33.73,15.85 34.04,15.54 X1.2 34.19,15.39 35.1,14.48 45.77,14.48 47.45,16.15 47.45,21.49 45.92,23.01 45.31,23.01 IC1.16
  Bottom 0.152: P4.6 6.76,14.48 8.28,14.48 9.65,15.85 33.73,15.85 34.04,15.54 X1.2
VCAP  (1 unrouted)
VDD  (30 unrouted)
  Top 0.152: 84.18,16.61 84.63,17.07 U3.1 | 84.18,16.61 82.8,15.24 | 75.34,26.36 75.34,25.45 84.18,16.61
VDDA  (2 unrouted)
VIN_DC  (via drill 0.33)  (4 unrouted)
  Top 0.152: v65.58,10.97 67.72,10.97
  Top 2.032: JP1.PWR 50.39,10.8 52.17,12.58 56.37,12.58 U$6.3
  Bottom 0.152: v65.58,10.97 48.67,10.97 48.51,10.82 JP1.PWR 48.36,10.82 46.53,12.65 40.59,12.65 40.44,12.5 33.73,12.5 31.9,14.33 21.69,14.33 P4.1

## Text on the board
tNames: NSVR | Hardlight 1